# EAGLE board update_alimentation (EAGLE 9.0.0)

Size 160 x 100 mm. Coordinates in mm from the lower left corner, seen from the top.
Outline: 0,0 160,0 160,100 0,100 0,0
Copper layers (1*16): Top 0.035mm / dielectric 1.5mm / Bottom 0.035mm
Design rules "default": minimum track width 6mil, minimum drill 0.35mm, track to track 6mil, track to pad 6mil, pad to pad 6mil, via to via 6mil, smd to smd 6mil, copper to edge 40mil, drill to drill 6mil, minimum pad ring 10mil, minimum via ring 8mil, stop-mask expansion 4mil, vias tented up to drill 0mil, thermal gap 10mil
Net classes: 0 default: width 0.254 mm, clearance 0.254 mm

## Footprints (pad centres in the part's own frame; a part is rotated, then mirrored left to right if it is on the bottom)
D/7343-31W = smd 2.95 x 2.7: + 3.375,0; - -3.375,0
E7,5-16 = drill 1.016 pad 3.15: + -3.81,0 | drill 1.016 pad 3.15 octagon: - 3.81,0
C0603-ROUND = smd 0.898 x 1.1: 1 -0.889,0; 2 0.889,0
C0603K = smd 1.05 x 1.08: 1 -0.875,0; 2 0.875,0
C0603 = smd 1.1 x 1: 1 -0.85,0; 2 0.85,0
C1210 = smd 1.6 x 2.7: 1 -1.4,0; 2 1.4,0
DO41-10 = drill 1.118: A 5.08,0; C -5.08,0
T05D = drill 1.016 long: 1 -3.404,-5.08; 2 -1.702,-0.914; 3 0,-5.08; 4 1.702,-0.914; 5 3.404,-5.08
TQFP44 = smd 1.5 x 0.5: 1 -5.8,4; 2 -5.8,3.2; 3 -5.8,2.4; 4 -5.8,1.6; 5 -5.8,0.8; 6 -5.8,0; 7 -5.8,-0.8; 8 -5.8,-1.6; 9 -5.8,-2.4; 10 -5.8,-3.2; 11 -5.8,-4; 23 5.8,-4; 24 5.8,-3.2; 25 5.8,-2.4; 26 5.8,-1.6; 27 5.8,-0.8; 28 5.8,0; 29 5.8,0.8; 30 5.8,1.6; 31 5.8,2.4; 32 5.8,3.2; 33 5.8,4 | smd 0.5 x 1.5: 12 -4,-5.8; 13 -3.2,-5.8; 14 -2.4,-5.8; 15 -1.6,-5.8; 16 -0.8,-5.8; 17 0,-5.8; 18 0.8,-5.8; 19 1.6,-5.8; 20 2.4,-5.8; 21 3.2,-5.8; 22 4,-5.8; 34 4,5.8; 35 3.2,5.8; 36 2.4,5.8; 37 1.6,5.8; 38 0.8,5.8; 39 0,5.8; 40 -0.8,5.8; 41 -1.6,5.8; 42 -2.4,5.8; 43 -3.2,5.8; 44 -4,5.8
10X04MTA = drill 1.016 long: 1 3.81,0; 2 1.27,0; 3 -1.27,0; 4 -3.81,0
RJ11-NO_SHIELD = drill 0.9 pad 1.778: 1 -3.175,8.89; 2 -1.905,6.35; 3 -0.635,8.89; 4 0.635,6.35; 5 1.905,8.89; 6 3.175,6.35 | hole 3.251: -5.08,0; 5.08,0
520249-2 = drill 0.889: 1 -1.905,6.35; 2 -0.635,8.89; 3 0.635,6.35; 4 1.905,8.89 | hole 3.251: -3.81,0; 3.81,0
TO-220-7 = drill 0.6 long: 1 -3.81,-5.08; 2 -2.54,0; 3 -1.27,-5.08; 4 0,0; 5 1.27,-5.08; 6 2.54,0; 7 3.81,-5.08
CHIP-LED0805 = smd 1.2 x 1.2: A 0,-1.05; C 0,1.05
1,6/0,9 = drill 0.914 pad 1.6 octagon: 1 0,0
PANASONIC_D = smd 3 x 1.4: + 2.4,0; - -2.4,0
SM49 = smd 5.08 x 1.778: 1 -4.826,0; 2 4.826,0
R0805 = smd 1.3 x 1.5: 1 -0.95,0; 2 0.95,0
TS42 = smd 1.6 x 1.4: 1 -4.2,2.25; 2 4.2,2.25; 3 -4.2,-2.25; 4 4.2,-2.25; 5 -4.2,0
02P = drill 0.914 long: 1 -1.27,0; 2 1.27,0
04P = drill 0.914 long: 1 -3.81,0; 2 -1.27,0; 3 1.27,0; 4 3.81,0
SOT23-DBV = smd 0.55 x 1.2: 1 -0.95,-1.3; 2 0,-1.3; 3 0.95,-1.3; 4 0.95,1.3; 5 -0.95,1.3
SOIC127P600X175-8N = smd 1.981 x 0.559: 1 -2.362,1.905; 2 -2.362,0.635; 3 -2.362,-0.635; 4 -2.362,-1.905; 5 2.362,-1.905; 6 2.362,-0.635; 7 2.362,0.635; 8 2.362,1.905
TO220ACS = drill 1.016 long: A 2.54,-2.54; C -2.54,-2.54
DO-201AD = drill 1.35 long: A 7.62,0; C -7.62,0
T9G = drill 2.2 pad 3.81: A 8.89,2.48; F -8.89,12.64; K -8.89,5.02 | drill 1.2 pad 2.54: B1 -5.08,-10.22; B2 5.08,-10.22
SOT23 = smd 1 x 1.4: 1 -0.95,-1.1; 2 0.95,-1.1; 3 0,1.1
KM-3.0 = drill 0.9 pad 1.93: 1 0,3.81; 2 0,-3.81
KM-2.1 = drill 0.9 pad 1.93: 1 0,3.81; 2 0,-3.81
KM-3.0_5V3A = drill 0.65 pad 1.676: 1 0,3.81; 2 0,-3.81
RJ6S = drill 0.813 long: A 2.54,0; E -2.54,0; S 0,-2.54
W237-102 = drill 1.194 long: 1 -2.5,-1.27; 2 2.5,-1.27
22-23-2021 = drill 1 long: 1 -1.27,0; 2 1.27,0

## Placement (x,y rotation side)
C1  220uF  [D/7343-31W]  55.88,64.77 90 top
C2  330uF  [D/7343-31W]  12.7,34.29 90 top
C4  330uF  [D/7343-31W]  12.7,22.86 270 top
C5  1000uF  [E7,5-16]  74.93,64.77 0 top
C6  100n  [C0603-ROUND]  109.22,62.23 0 top
C7  100n  [C0603K]  104.14,71.12 0 top
C8  100n  [C0603-ROUND]  115.57,62.23 0 top
C9  100n  [C0603K]  17.78,74.93 0 top
C10  1u  [C0603-ROUND]  106.68,77.47 0 top
C11  33pf  [C0603]  134.62,69.85 0 top
C12  33pf  [C0603]  143.51,69.85 0 top
C13  100n  [C0603]  146.05,77.47 0 top
C14  100n  [C0603]  114.3,77.47 0 top
C15  100n  [C0603]  111.76,69.85 0 top
C16  10uF  [D/7343-31W]  19.05,22.86 270 top
C17  0.01uF  [C0603]  123.19,62.23 0 top
C18  68uF  [D/7343-31W]  33.02,40.64 90 top
C19  10uF  [D/7343-31W]  25.4,40.64 90 top
C20  10uF  [D/7343-31W]  25.4,52.07 270 top
C21  68uF  [D/7343-31W]  33.02,52.07 270 top
C22  0.01uF  [C0603]  71.12,78.74 90 top
C23  100uF  [C1210]  120.65,8.89 270 top
C24  100uF  [C1210]  128.27,41.91 0 top
C25  100uF  [C1210]  128.27,49.53 0 top
C26  10uF  [D/7343-31W]  13.97,8.89 90 top
C27  220uF  [D/7343-31W]  83.82,48.26 270 top
C28  68uF  [D/7343-31W]  102.87,19.05 270 top
C29  68uF  [D/7343-31W]  102.87,6.35 90 top
C30  10uF  [D/7343-31W]  25.4,22.86 270 top
D5  1N4004  [DO41-10]  107.95,31.75 0 top
IC1  LM2596T  [T05D]  36.83,96.52 0 top
IC2  LM2596T  [T05D]  55.88,96.52 0 top
IC4  DSPIC33FJ128MC804PT  [TQFP44]  107.95,48.26 0 top
J1  [10X04MTA]  2.54,35.56 270 top
J2  [10X04MTA]  2.54,24.13 270 top
J3  [10X04MTA]  2.54,12.7 270 top
J4  RJ11-2L-B  [RJ11-NO_SHIELD]  147.32,36.83 270 top
J5  [520249-2]  147.32,7.62 270 top
J6  [520249-2]  147.32,21.59 270 top
LM2678S_ADJ  [TO-220-7]  73.79,96.9 0 top
LM2678T-12  [TO-220-7]  89.28,96.9 0 top
ON  GREEN  [CHIP-LED0805]  120.65,19.05 0 top
ON1  GREEN  [CHIP-LED0805]  113.03,19.05 0 top
PAD1  [1,6/0,9]  113.03,83.82 0 top
PAD2  [1,6/0,9]  107.95,88.9 0 top
PAD3  [1,6/0,9]  107.95,83.82 0 top
PAD4  [1,6/0,9]  142.24,88.9 0 top
PAD5  [1,6/0,9]  138.43,88.9 0 top
PAD6  [1,6/0,9]  133.35,88.9 0 top
PAD7  [1,6/0,9]  128.27,88.9 0 top
PAD8  [1,6/0,9]  123.19,88.9 0 top
PAD9  [1,6/0,9]  118.11,88.9 0 top
PAD10  [1,6/0,9]  128.27,83.82 0 top
PAD11  [1,6/0,9]  146.05,83.82 0 top
PAD12  [1,6/0,9]  133.35,83.82 0 top
PAD13  [1,6/0,9]  142.24,83.82 0 top
PAD14  [1,6/0,9]  138.43,83.82 0 top
PAD15  [1,6/0,9]  123.19,83.82 0 top
PAD16  [1,6/0,9]  118.11,83.82 0 top
PAD17  [1,6/0,9]  113.03,88.9 0 top
PAD18  [1,6/0,9]  146.05,88.9 0 top
PC2  47u  [PANASONIC_D]  130.81,7.62 0 top
Q1  [SM49]  140.97,55.88 180 top
R1  1k  [R0805]  121.92,77.47 0 top
R2  10k  [R0805]  138.43,77.47 0 top
R3  4.7k  [R0805]  118.11,69.85 0 top
R4  10k  [R0805]  127,69.85 0 top
R5  500  [R0805]  120.65,35.56 0 top
R6  1k  [R0805]  129.54,77.47 0 top
R7  4.12k  [R0805]  93.98,29.21 0 top
R8  1k  [R0805]  81.28,30.48 0 top
RESET  TS42031-160R-TR-7260  [TS42]  93.98,76.2 0 top
SL1  [02P]  3.81,91.44 270 top
SL2  [04P]  3.81,83.82 270 top
U2  LP2985-33DBVR  [SOT23-DBV]  95.25,63.5 0 top
U$1  MCP2551-I/SN  [SOIC127P600X175-8N]  128.27,25.4 0 top
U$2  [TO220ACS]  108.2,99.69 0 top
U$3  [TO220ACS]  125.35,99.69 0 top
U$4  [DO-201AD]  54.61,81.28 180 top
U$5  [DO-201AD]  33.02,81.28 180 top
U$6  T9GV1L14-5  [T9G]  60.96,40.64 180 top
U$7  BSH108  [SOT23]  113.03,8.89 0 top
U$8  22.8uH  [KM-3.0]  61.59,11.18 90 top
U$9  14.8uH  [KM-2.1]  74.04,11.05 90 top
U$10  53uH  [KM-3.0_5V3A]  36.58,11.18 90 top
U$11  53uH  [KM-3.0_5V3A]  49.28,11.18 90 top
U$12  RJ26FX102  [RJ6S]  91.44,13.97 0 top
X1  [W237-102]  155.96,51.94 270 top
X9  22-23-2021  [22-23-2021]  156.46,85.09 90 top
X10  22-23-2021  [22-23-2021]  156.46,79.38 90 top
X11  22-23-2021  [22-23-2021]  156.46,73.66 90 top
X12  [W237-102]  155.96,65.53 270 top
X13  [W237-102]  3.81,49.53 90 top
X14  [W237-102]  3.81,59.69 90 top
X15  [W237-102]  3.81,71.12 90 top

## Library data of the parts
C1 C27 = rcl; OC_FARNELL: 2283872; SPICEPREFIX: C
C2 C4 = rcl; OC_FARNELL: 1135198; SPICEPREFIX: C
C5 C17 C22 = rcl; SPICEPREFIX: C
C6-C9 = SmartPrj; OC_FARNELL: 2210925
C10 = SmartPrj; OC_FARNELL: 2346901
C11 C12 = LibPerso; OC_FARNELL: 1740598
C13-C15 = LibPerso; OC_FARNELL: 2210925
C16 C19 C20 C30 = rcl; OC_FARNELL: 2424754; SPICEPREFIX: C
C18 C21 C28 C29 = rcl; OC_FARNELL: 2524603; SPICEPREFIX: C
C23-C25 = rcl; OC_FARNELL: 1658510; SPICEPREFIX: C
C26 = rcl; OC_FARNELL: 1432608; SPICEPREFIX: C
D5 = diode
IC1 IC2 = national-semiconductor; MPN: LM2596T-ADJ/LF02; OC_FARNELL: 9494162; OC_NEWARK: 65K5910
IC4 = microchip-dspic33
J1-J3 = con-amp
J4 = LibPerso; MF: TYCO ELECTRONICS; MPN: RJ11-2L-B; OC_FARNELL: 1393306; OC_NEWARK: 83F4463
J5 J6 = LibPerso; OC_FARNELL: 1137972; OC_RS: 477-359
LM2678S_ADJ = Robot_MT; OC_FARNELL: 9778357; SPICEPREFIX: X
LM2678T-12 = Robot_MT; OC_FARNELL: 9778357
ON ON1 = led; OC_FARNELL: 8529906
PAD1-PAD18 = wirepad
PC2 = rcl; OC_FARNELL: 1850100; SPICEPREFIX: C
Q1 = crystal; OC_FARNELL: 1842332; OC_NEWARK: unknown
R1-R4 R6 = LibPerso
R5 R7 R8 = resistor
RESET = SmartPrj; OC_FARNELL: 2060823
SL1 SL2 = con-amp-quick; OC_FARNELL: unknown; OC_NEWARK: unknown
U2 = SmartPrj; OC_FARNELL: 2395925
U$1 = LibPerso; MPN: MCP2551-I/SN; OC_FARNELL: 9758569; OC_NEWARK: 69K7604; PACKAGE: SOIC-8; SUPPLIER: Microchip
U$2 = Robot_MT; OC_FARNELL: 2677696
U$3 = Robot_MT; OC_FARNELL: 9557296
U$4 U$5 = Robot_MT; OC_FARNELL: 1017590
U$6 = Robot_MT; OC_FARNELL: 2857449
U$7 U$12 = Robot_MT
U$8 = Robot_MT; OC_FARNELL: 2215927
U$9 = Robot_MT; OC_FARNELL: 2215928
U$10 U$11 = Robot_MT; OC_FARNELL: 2215963
X1 X12-X15 = con-wago-500; MPN: 237-102; OC_FARNELL: unknown; OC_NEWARK: 70K9898
X9-X11 = con-molex; MF: MOLEX; MPN: 22-23-2021; OC_FARNELL: 1462926; OC_NEWARK: 25C3832

## Nets
5-GND: RESET.5
5V_3A: X9.1 X10.1 X11.1 X12.2
+3V3: C10.2 C13.1 C14.1 C15.1 IC4.17 IC4.28 IC4.40 J4.2 PAD7.1 PAD8.1 PAD9.1 PAD10.1 R4.1 U2.5
+5V: C1.+ C6.2 C8.2 C9.2 D5.C IC2.4 J5.1 J6.1 PAD15.1 PAD16.1 PAD17.1 PAD18.1 PC2.+ R1.2 R3.2 R6.2 SL1.2 SL2.1 U2.1 U2.3 U$1.3 U$6.B1 U$11.2
+5V_3A: C27.+ IC1.4 U$10.2
AN0/RA0: IC4.19 PAD1.1
AN1/RA1: IC4.20 PAD2.1
CAN_RX: IC4.36 U$1.4
CAN_TX: IC4.33 R3.1 U$1.1
CANH: J5.2 J6.2 U$1.7
CANL: J5.3 J6.3 U$1.6
GND: C1.- C2.- C4.- C5.- C6.1 C7.2 C8.1 C9.1 C10.1 C11.2 C12.2 C13.2 C14.2 C15.2 C16.- C18.- C19.- C20.- C21.- C23.2 C24.2 C25.2 C26.- C27.- C28.- C29.- C30.- IC1.3 IC1.5 IC2.3 IC2.5 IC4.6 IC4.16 IC4.29 IC4.39 J1.4 J2.4 J3.4 J4.3 J5.4 J6.4 LM2678S_ADJ.4 LM2678T-12.4 ON.C PAD11.1 PAD12.1 PAD13.1 PAD14.1 PC2.- R2.1 RESET.3 RESET.4 SL1.1 SL2.4 U2.2 U$1.2 U$2.A U$3.A U$4.A U$5.A U$7.2 X1.2 X9.2 X10.2 X11.2 X12.1 X15.2
INT0/RP7/RB7: IC4.43
N$1: ON1.A R5.2
N$2: ON.A R1.1 R6.1
N$3: X13.2 X14.1
N$4: X14.2 X15.1
N$5: C7.1 IC4.7
N$6: C2.+ IC1.1 U$6.A X13.1
N$7: LM2678S_ADJ.6 R7.1 R8.2
N$8: R2.2 U$1.8
N$9: IC2.2 U$5.C U$11.1
N$10: IC4.34
N$11: C17.2 LM2678T-12.1 U$3.C U$9.1
N$12: IC1.2 U$4.C U$10.1
N$13: C22.1 LM2678S_ADJ.3
N$14: C17.1 LM2678T-12.3
N$15: C4.+ C5.+ C16.+ C19.+ C20.+ C26.+ C30.+ IC2.1 LM2678S_ADJ.2 LM2678T-12.2 R8.1 U$6.K X1.1
N$16: C22.2 LM2678S_ADJ.1 U$2.C U$8.1
N$17: C23.1 C24.1 C25.1 U$8.2 U$12.E
N$18: D5.A U$6.B2 U$7.3
N$19: R7.2 U$12.S
OSC1: C11.1 IC4.30 Q1.1
OSC2: C12.1 IC4.31 Q1.2
PGC: IC4.22 J4.5 PAD6.1
PGD: IC4.21 J4.4 PAD5.1
PWM1H1/RP14/RB14: IC4.14
PWM1H2/RP12/RB12: IC4.10
PWM1H3/RP10/RB10: IC4.8
PWM1L1/RP15/RB15: IC4.15
PWM1L2/RP13/RB13: IC4.11
PWM1L3/RP11/RB11: IC4.9
PWM2H1/RP22: IC4.2
PWM2L1/RP23/RC7: IC4.3
RA7: IC4.13 ON1.C U$7.1
RA8: IC4.32 R5.1
RESET: IC4.18 J4.1 R4.2 RESET.1 RESET.2
RP2/RB2/AN4: IC4.23 PAD3.1
RP3/RB3/AN5: IC4.24 PAD4.1
RP5/SDI/ASDA: IC4.41
RP6/RB6/SCK/ASCL: IC4.42
RP16/RC0/AN6: IC4.25
RP17/RC1/AN7: IC4.26
RP20/TX/SDO: IC4.37 SL2.3
RP21/RC5/RX/SS: IC4.38 SL2.2
RP24/RC8: IC4.4
RP25/RC9: IC4.5
SCL/RP8: IC4.44
SDA/RP9: IC4.1
V+: C18.+ C21.+ C28.+ C29.+ U$9.2

## Tracks (layer width: path | path; a pad name or v marks a point on that pad's centre or on a via)
5V_3A  (3 unrouted)
+3V3  (13 unrouted)
+5V  (22 unrouted)
+5V_3A  (2 unrouted)
AN0/RA0  (1 unrouted)
AN1/RA1  (1 unrouted)
CAN_RX  (1 unrouted)
CAN_TX  (2 unrouted)
CANH  (2 unrouted)
CANL  (2 unrouted)
GND  (66 unrouted)
N$1  (1 unrouted)
N$2  (2 unrouted)
N$3  (1 unrouted)
N$4  (1 unrouted)
N$5  (1 unrouted)
N$6  (3 unrouted)
N$7  (2 unrouted)
N$8  (1 unrouted)
N$9  (2 unrouted)
N$11  (3 unrouted)
N$12  (2 unrouted)
N$13  (1 unrouted)
N$14  (1 unrouted)
N$15  (12 unrouted)
N$16  (3 unrouted)
N$17  (4 unrouted)
N$18  (2 unrouted)
N$19  (1 unrouted)
OSC1  (2 unrouted)
OSC2  (2 unrouted)
PGC  (2 unrouted)
PGD  (2 unrouted)
RA7  (2 unrouted)
RA8  (1 unrouted)
RESET  (4 unrouted)
RP2/RB2/AN4  (1 unrouted)
RP3/RB3/AN5  (1 unrouted)
RP20/TX/SDO  (1 unrouted)
RP21/RC5/RX/SS  (1 unrouted)
V+  (4 unrouted)